# Altium PCB OS-2024-Badge-PCB-REV0.PcbDoc
Units mil, origin at the board's own origin, x right, y up, seen from the top; angles counter-clockwise.
Board outline 2745 x 3430 mil, 2 copper layers (Top Layer, Bottom Layer); 94 components, 73 nets, 270 pads, 77 vias.
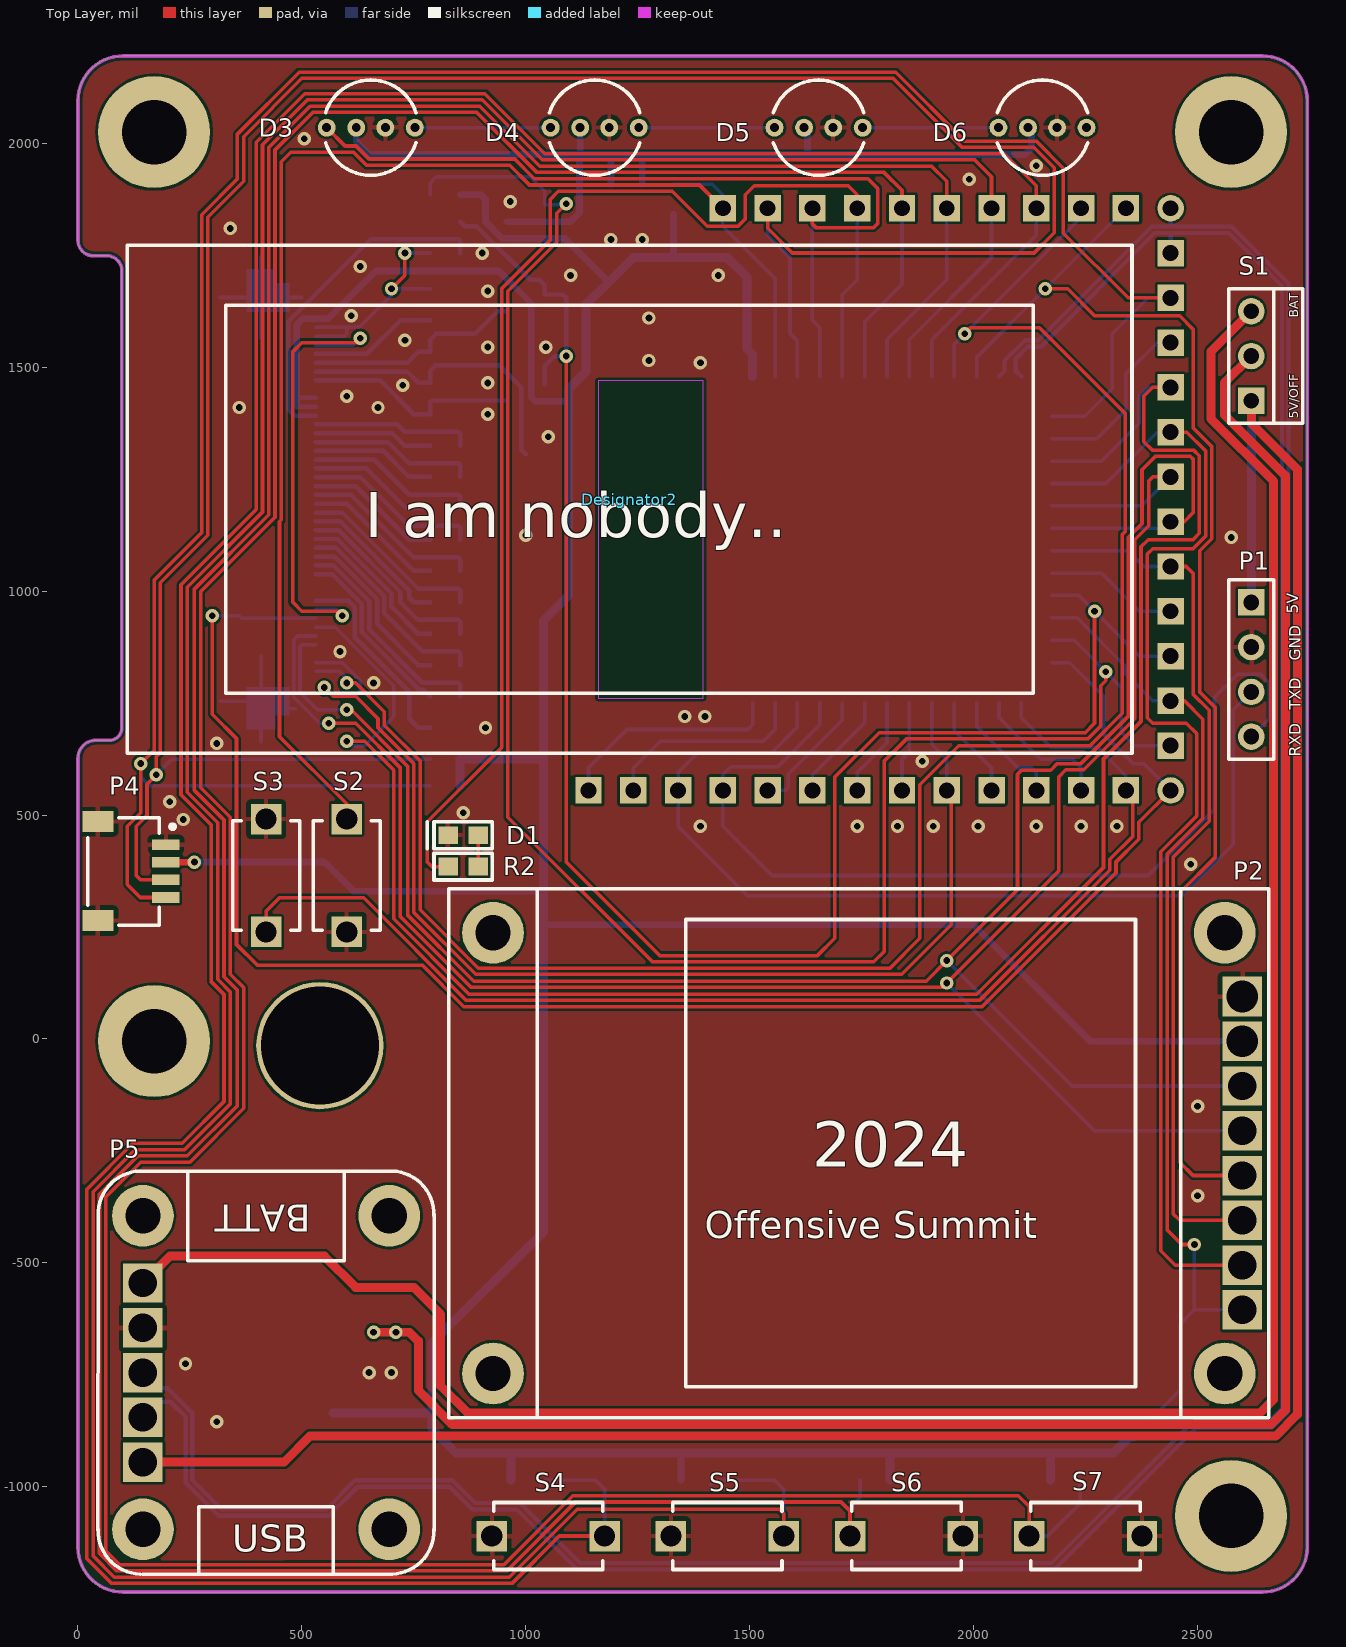
[diagram p0: Top Layer view]
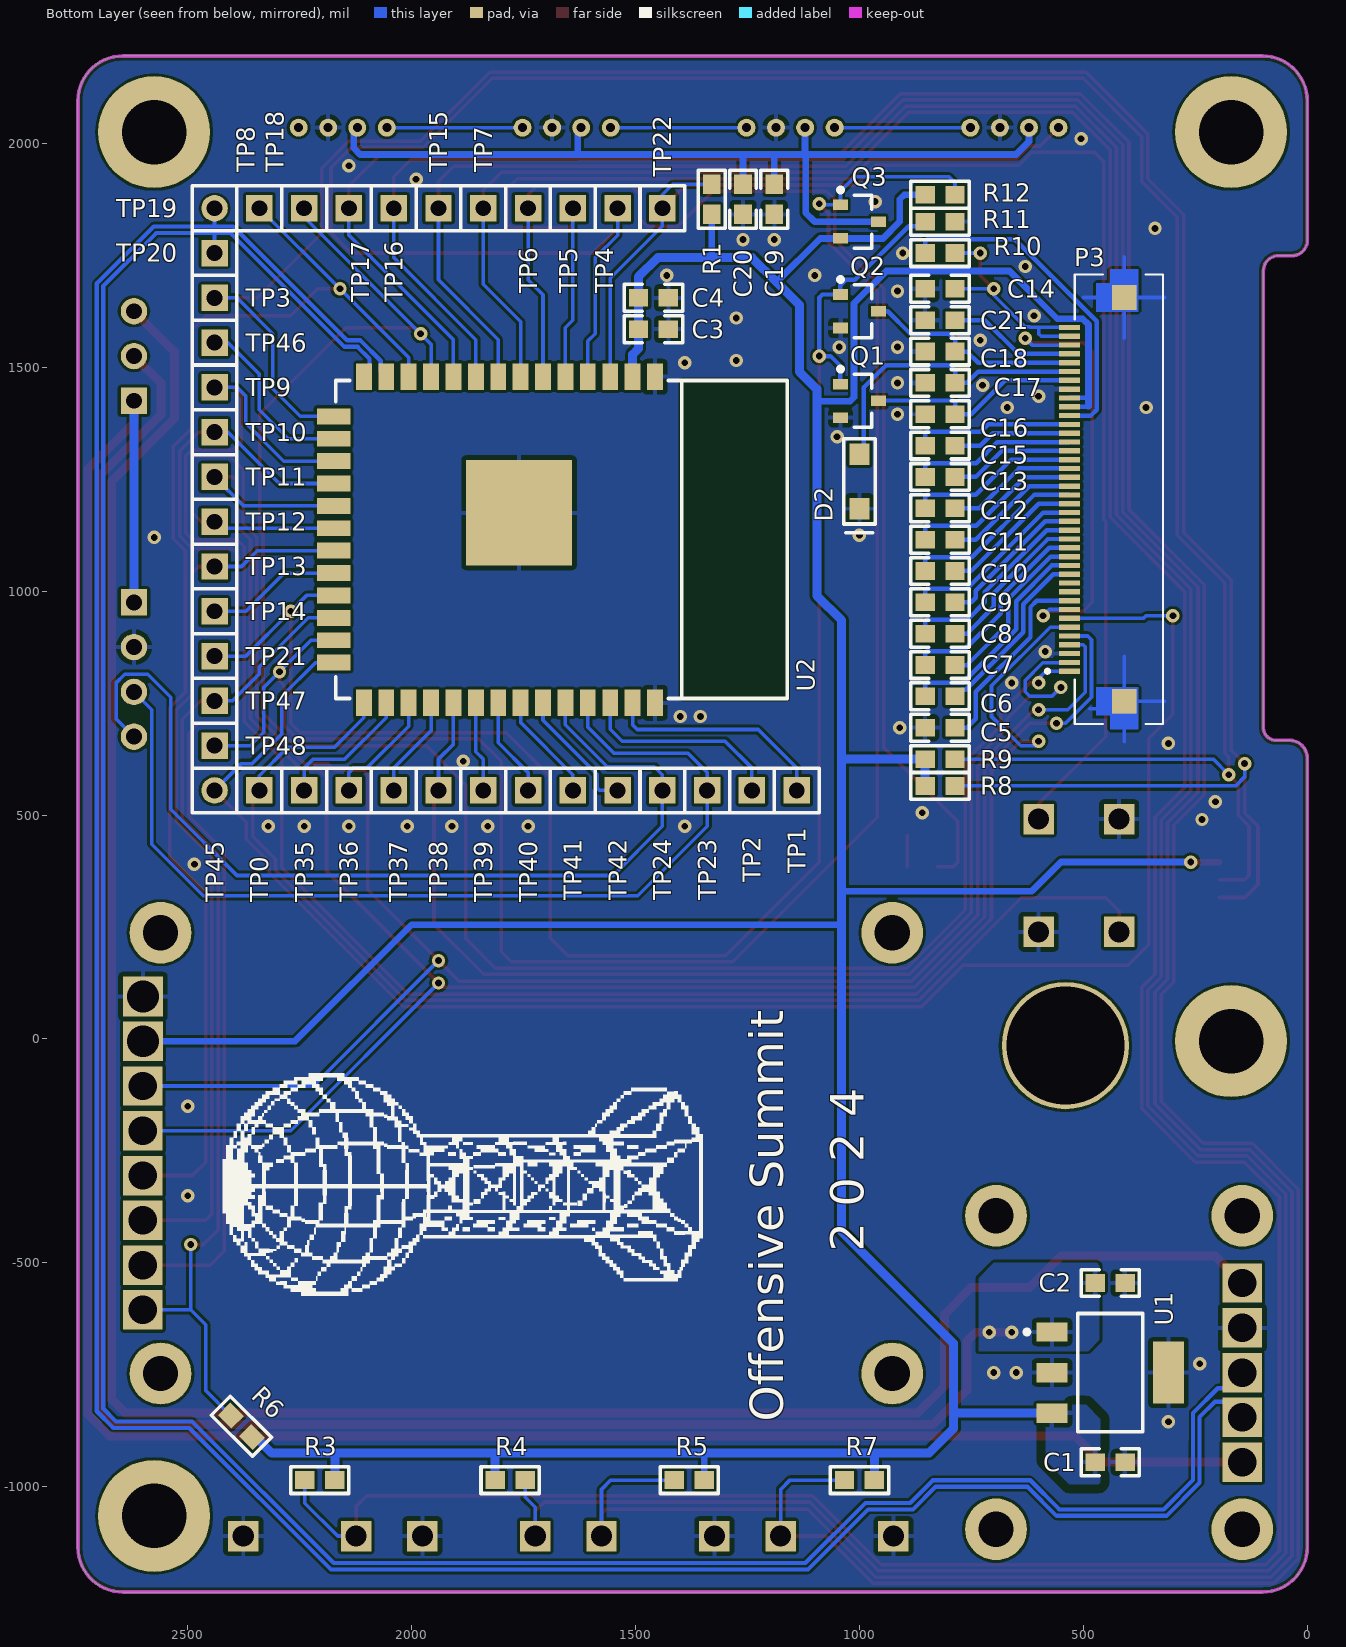
[diagram p1: Bottom Layer view, seen from below]

## Layer stack, top to bottom
Top Solder: solder mask 0.4, Solder Resist, Dk 3.5
Top Layer: signal copper 1.4
Dielectric1: dielectric 12.6, FR-4, Dk 4.8
Bottom Layer: signal copper 1.4
Bottom Solder: solder mask 0.4, Solder Resist, Dk 3.5

## Board outline
0,-1135 0,627 cw(c40,627) 40,667 70,667 ccw(c70,695) 98,695 98,1715 ccw(c64,1715) 64,1749 34,1749 cw(c34,1783) 0,1783 0,2095 cw(c100,2095) 100,2195 2645,2195 cw(c2645,2095) 2745,2095 2745,-1135 cw(c2645,-1135) 2645,-1235 100,-1235 cw(c100,-1135)

## Design rules (kind name [scope] priority, off if disabled: settings)
Clearance Clearance_2 [(InPolygon AND InNet('3.3V')) vs (InPolygon AND InNet('GND'))] p1: gap=20 ignorepadtopadclearanceinfootprint=FALSE
Clearance Clearance_3 [InNet('DP') vs InNet('DM')] p2: gap=5 ignorepadtopadclearanceinfootprint=FALSE except(0: Arc-Hole Track-Hole SMDPad-Hole THPad-Hole Via-Hole Fill-Hole Poly-Hole Region-Hole Text-Hole)
Clearance Clearance_1 [InNetClass('USB') vs InNet('GND')] p3: gap=5 ignorepadtopadclearanceinfootprint=FALSE except(0: Arc-Hole Track-Hole SMDPad-Hole THPad-Hole Via-Hole Fill-Hole Poly-Hole Region-Hole Text-Hole)
Clearance [All] p4: gap=6 ignorepadtopadclearanceinfootprint=FALSE except(0: Arc-Hole Track-Hole SMDPad-Hole THPad-Hole Via-Hole Fill-Hole Poly-Hole Region-Hole Text-Hole)
HoleSize [All] p1: absolutevalues=TRUE maxlimit=270 minlimit=15 maxpercent=80.000 minpercent=20.000
MinimumSolderMaskSliver [All] p1: minsoldermaskwidth=2.5
PolygonConnect PolygonConnect_1 [IsVia vs IsPolygon] p1: connectstyle=Direct reliefconductorwidth=10 reliefentries=4 polygonreliefangle="90 Angle" airgapwidth=10
PolygonConnect [All] p2: connectstyle=Relief reliefconductorwidth=10 reliefentries=4 polygonreliefangle="90 Angle" airgapwidth=10
RoomDefinition OS-2024-Badge-Schematic-REV0 [InComponentClass('OS-2024-Badge-Schematic-REV0')] p1: confinementstyle=ConfineIn formatcopy=TRUE lockcomponents=FALSE outline -8962.2,-7193.9 -6962.2,-7193.9 -6962.2,-6193.9 -8962.2,-6193.9
RoutingVias [All] p1: holewidth=15 width=30 viastyle="Through Hole" minholewidth=15 minwidth=30 maxholewidth=15 maxwidth=30
SilkToSolderMaskClearance SilkscreenOverComponentPads [IsPad] p1: minsilkscreentomaskgap=3 clearancetoexposedcopper=TRUE
SolderMaskExpansion [All] p1: expansion=4
Width Width_1 [InNetClass('USB')] p1: maxlimit=9.5 minlimit=9.5 preferedwidth=9.5
Width [All] p2: maxlimit=25 minlimit=8 preferedwidth=8
27 further rules are at their usual default settings.

## Classes and differential pairs
net class USB: DM DP

## Components (designator, comment, footprint, x,y, rotation, side; value= is the part's Value field where it differs from the comment)
C1 "1u" 0603C 440,-945 r180 bottom
C2 "1u" 0603C 440,-545 r180 bottom
C3 "10u" 0603C 1460,1585 r180 bottom
C4 "100n" 0603C 1460,1655 r180 bottom
C5 "2.2u" 0603C 820,695 r180 bottom
C6 "2.2u" 0603C 820,765 r0 bottom
C7 "2.2u" 0603C 820,835 r0 bottom
C8 "2.2u" 0603C 820,905 r0 bottom
C9 "2.2u" 0603C 820,975 r0 bottom
C10 "2.2u" 0603C 820,1045 r180 bottom
C11 "2.2u" 0603C 820,1115 r180 bottom
C12 "2.2u" 0603C 820,1185 r180 bottom
C13 "2.2u" 0603C 820,1255 r180 bottom
C14 "1u" 0603C 820,1675 r180 bottom
C15 "2.2u" 0603C 820,1325 r180 bottom
C16 "2.2u" 0603C 820,1395 r0 bottom
C17 "2.2u" 0603C 820,1465 r0 bottom
C18 "2.2u" 0603C 820,1535 r0 bottom
C19 "10u" 0603C 1190,1875 r270 bottom
C20 "1u" 0603C 1260,1875 r270 bottom
C21 "2.2u" 0603C 820,1605 r0 bottom
D1 "LED2" 0603LED 860,455 r180 top
D2 "40V" SOD-123FL 1000,1245 r90 bottom
D3 "RGB" COM-12986 653.82,2035 r0 top
D4 "RGB" COM-12986 1153.82,2035 r0 top
D5 "RGB" COM-12986 1653.82,2035 r0 top
D6 "RGB" COM-12986 2153.82,2035 r0 top
Designator2 "Comment" E2200CS021 1231.58,1205 r0 top
P1 "Header 4" HDR1X4 2620,975 r270 top
P2 "Header 8" TFT144SPI 1743.7,-255 r270 top
P3 "CONN FPC TOP 40POS 0.5MM R/A" AMPHENOL_62684-402100ALF 390,1205 r90 bottom locked
P4 "SM04B-SRSS-TB" SM04B-TRSS-TB 120,375 r270 top
P5 "Header 5" MICRO-LIPO-USBC 420,-745 r270 top
Q1 "2N7002" SOT-23-N 1000,1425 r180 bottom
Q2 "2N7002" SOT-23-N 1000,1625 r180 bottom
Q3 "DMP2045U" SOT-23-P 1000,1825 r180 bottom
R1 "1k" 0603R 1330,1875 r270 bottom
R2 "1k" 0603R 860,385 r0 top
R3 "DNP" 0603R 2205,-985 r180 bottom
R4 "DNP" 0603R 1780,-985 r0 bottom
R5 "DNP" 0603R 1380,-985 r180 bottom
R6 "330" 0603R 2380,-865 r225 bottom
R7 "DNP" 0603R 1000,-985 r180 bottom
R8 "10k" 0603R 820,565 r180 bottom
R9 "10k" 0603R 820,625 r180 bottom
R10 "2k" 0603R 820,1755 r0 bottom
R11 "47k" 0603R 820,1825 r180 bottom
R12 "47k" 0603R 820,1885 r180 bottom
S1 "SW-SPDT" HDR1X3 2620,1425 r90 top
S2 "SPST-NO" PTS636SL43LFS 600,365 r270 top
S3 "SPST-NO" PTS636SL43LFS 420,365 r90 top
S4 "SPST-NO" PTS636SL43LFS 1050,-1110 r180 top
S5 "SPST-NO" PTS636SL43LFS 1450,-1110 r180 top
S6 "SPST-NO" PTS636SL43LFS 1850,-1110 r0 top
S7 "SPST-NO" PTS636SL43LFS 2250,-1110 r0 top
TP0 "Test Point" Testpoint#1 2340,555 r0 bottom
TP1 "Test Point" Testpoint#1 1140,555 r0 bottom
TP2 "Test Point" Testpoint#1 1240,555 r90 bottom
TP3 "Test Point" Testpoint#1 2440,1655 r90 bottom
TP4 "Test Point" Testpoint#1 1540,1855 r0 bottom
TP5 "Test Point" Testpoint#1 1640,1855 r0 bottom
TP6 "Test Point" Testpoint#1 1740,1855 r90 bottom
TP7 "Test Point" Testpoint#1 1840,1855 r90 bottom
TP8 "Test Point" Testpoint#1 2340,1855 r90 bottom
TP9 "Test Point" Testpoint#1 2440,1455 r0 bottom
TP10 "Test Point" Testpoint#1 2440,1355 r0 bottom
TP11 "Test Point" Testpoint#1 2440,1255 r180 bottom
TP12 "Test Point" Testpoint#1 2440,1155 r270 bottom
TP13 "Test Point" Testpoint#1 2440,1055 r180 bottom
TP14 "Test Point" Testpoint#1 2440,955 r90 bottom
TP15 "Test Point" Testpoint#1 1940,1855 r90 bottom
TP16 "Test Point" Testpoint#1 2040,1855 r180 bottom
TP17 "Test Point" Testpoint#1 2140,1855 r180 bottom
TP18 "Test Point" Testpoint#1 2240,1855 r180 bottom
TP19 "Test Point" Testpoint#2 2440,1855 r180 bottom
TP20 "Test Point" Testpoint#1 2440,1755 r90 bottom
TP21 "Test Point" Testpoint#1 2440,855 r90 bottom
TP22 "Test Point" Testpoint#1 1440,1855 r0 bottom
TP23 "Test Point" Testpoint#1 1340,555 r0 bottom
TP24 "Test Point" Testpoint#1 1440,555 r90 bottom
TP35 "Test Point" Testpoint#1 2240,555 r180 bottom
TP36 "Test Point" Testpoint#1 2140,555 r90 bottom
TP37 "Test Point" Testpoint#1 2040,555 r270 bottom
TP38 "Test Point" Testpoint#1 1940,555 r90 bottom
TP39 "Test Point" Testpoint#1 1840,555 r270 bottom
TP40 "Test Point" Testpoint#1 1740,555 r180 bottom
TP41 "Test Point" Testpoint#1 1640,555 r90 bottom
TP42 "Test Point" Testpoint#1 1540,555 r90 bottom
TP45 "Test Point" Testpoint#2 2440,555 r90 bottom
TP46 "Test Point" Testpoint#1 2440,1555 r90 bottom
TP47 "Test Point" Testpoint#1 2440,755 r0 bottom
TP48 "Test Point" Testpoint#1 2440,655 r0 bottom
U1 "TC1262-3.3VDBTR" SOT-223-2 440,-745 r270 bottom
U2 "ESP32-S3-WROOM" ESP32-S3-WROOM-1-N16R8 1161.57,1470.28 r270 bottom

## Footprints (in the part's own frame and the unit in brackets; to place one, negate y for a bottom-side part, rotate by r counter-clockwise, add the part's x,y. Pads: shape width x height; smd on the part's side, far side on the other; paste and mask are expansions set on the pad)
0603C [mm] "Chip Capacitor, Body 1.6x0.8mm, IPC High Density"
  rect 1.1x1 smd: 1(-0.85,0) 2(0.85,0)
  silkscreen extent -1.65,-0.76 1.65,0.76, body extent -0.87,-0.48 0.87,0.48, height 1.3
0603LED [mm] "Chip Diode; Body 1.6 x 0.9 mm (LxW typ)"
  rect 1.1x1 smd: 1(-0.85,0) 2(0.85,0)
  silkscreen extent -1.65,-0.76 2.03,0.76, body extent -0.8,-0.45 0.8,0.45, height 0.55
0603R [mm] "Chip Resistor; Body 1.6 x 0.9 mm (LxW typ)"
  rect 1.1x1 smd: 1(-0.85,0) 2(0.85,0)
  silkscreen extent -1.65,-0.76 1.65,0.76, body extent -0.8,-0.45 0.8,0.45, height 0.55
AMPHENOL_62684-402100ALF [mm]
  rect 0.3x1.2 smd: 1(-9.75,3.575) 2(-9.25,3.575) 3(-8.75,3.575) 4(-8.25,3.575) 5(-7.75,3.575) 6(-7.25,3.575) 7(-6.75,3.575) 8(-6.25,3.575) 9(-5.75,3.575) 10(-5.25,3.575) 11(-4.75,3.575) 12(-4.25,3.575) 13(-3.75,3.575) 14(-3.25,3.575) 15(-2.75,3.575) 16(-2.25,3.575) 17(-1.75,3.575) 18(-1.25,3.575) 19(-0.75,3.575) 20(-0.25,3.575) 21(0.25,3.575) 22(0.75,3.575) 23(1.25,3.575) 24(1.75,3.575) 25(2.25,3.575) 26(2.75,3.575) 27(3.25,3.575) 28(3.75,3.575) 29(4.25,3.575) 30(4.75,3.575) 31(5.25,3.575) 32(5.75,3.575) 33(6.25,3.575) 34(6.75,3.575) 35(7.25,3.575) 36(7.75,3.575) 37(8.25,3.575) 38(8.75,3.575) 39(9.25,3.575) 40(9.75,3.575)
  rect 1.4x1.4 smd paste-2 mask+0: S1(-11.45,0.475) S2(11.45,0.475)
  Top Layer region: 12.25,1.275 13.05,1.275 13.05,-0.325 10.65,-0.325 10.65,2.075 12.25,2.075
  Top Layer region: -10.65,-0.325 -13.05,-0.325 -13.05,1.275 -12.25,1.275 -12.25,2.075 -10.65,2.075
  silkscreen extent -12.75,-1.73 12.75,4.92, body extent -12.75,-2.5 12.75,3.1, height 2
COM-12986 [mil] "ADDRESS LED DISCR SERIAL RGB 5PC"
  round 40 hole 20: 1(-98.43,0) 2(-32.48,0) 3(32.48,0) 4(98.43,0)
  silkscreen extent -101,-106 101,106
E2200CS021 [mil] "E2200CS021 DISPLAY 2.0\" B&W AURORA MB EC"
  silkscreen extent -1122,-567 1122,567, body extent -1122,-567 1122,567, height 39
ESP32-S3-WROOM-1-N16R8 [mm] "ESP32-S3-WROOM-1-N16R8"
  rect 1.5x0.9 smd: 1(-0.225,-7.493) 2(-0.225,-8.763) 3(-0.225,-10.033) 4(-0.225,-11.303) 5(-0.225,-12.573) 6(-0.225,-13.843) 7(-0.225,-15.113) 8(-0.225,-16.383) 9(-0.225,-17.653) 10(-0.225,-18.923) 11(-0.225,-20.193) 12(-0.225,-21.463) 13(-0.225,-22.733) 14(-0.225,-24.003) 27(18.284,-24.003) 28(18.284,-22.733) 29(18.284,-21.463) 30(18.284,-20.193) 31(18.284,-18.923) 32(18.284,-17.653) 33(18.284,-16.383) 34(18.284,-15.113) 35(18.284,-13.843) 36(18.284,-12.573) 37(18.284,-11.303) 38(18.284,-10.033) 39(18.284,-8.763) 40(18.284,-7.493)
  rect 0.9x1.9 smd paste-0.686: 15(2.03,-25.718) 16(3.3,-25.718) 17(4.57,-25.718) 18(5.84,-25.718) 19(7.11,-25.718) 20(8.38,-25.718) 21(9.65,-25.718) 22(10.92,-25.718) 23(12.19,-25.718) 24(13.46,-25.718)
  rect 0.9x1.9 smd: 25(14.73,-25.718) 26(16,-25.718)
  rect 6x6 smd paste-3.048: 101(7.5,-15.2)
  Keep-Out Layer region: 0,0 18.034,0 18.034,-5.969 0,-5.969
  silkscreen extent 0,-25.6 18.03,0
HDR1X3 [mm] "Connector; Header; 3 Position"
  rect 1.5x1.5 hole 0.9: 1(0,0)
  round 1.5 hole 0.9: 2(2.54,0) 3(5.08,0)
  silkscreen extent -1.27,-1.27 6.35,1.27
HDR1X4 [mm] "Connector; Header; 4 Position"
  rect 1.5x1.5 hole 0.9: 1(0,0)
  round 1.5 hole 0.9: 2(2.54,0) 3(5.08,0) 4(7.62,0)
  silkscreen extent -1.27,-1.27 8.89,1.27
MICRO-LIPO-USBC [mm] "Adafruit MicroLipo USB Charger"
  rect 2.237x2.237 hole 1.61: 1(5.08,-6.985) 2(2.54,-6.985) 3(0,-6.985) 4(-2.54,-6.985) 5(-5.08,-6.985)
  round 3.5 hole 2: M1(-8.89,6.985) M1(-8.89,-6.985) M1(8.89,6.985) M1(8.89,-6.985)
  silkscreen extent -11.43,-9.54 11.43,9.53
PTS636SL43LFS [mil] "Tactile Switch SPST-NO Top Actuated Through Hole"
  rect 68x68 hole 47.24: 1(-125.98,0) 2(125.98,0)
  silkscreen extent -122,-75 122,75, body extent -133,-69 133,69, height 197
SM04B-TRSS-TB [mm] "CONN HEADER SMD R/A 4POS 1MM"
  rect 1.2x1.749 smd: 0(-2.8,-1.912) 0(2.8,-1.912)
  rect 0.6x1.55 smd: 1(-1.5,1.938) 2(-0.5,1.938) 3(0.5,1.938) 4(1.5,1.938)
  silkscreen extent -3.02,-2.51 3.07,2.44, body extent -3.02,-2.51 3.07,1.56, height 6.25
SOD-123FL [mm] "DIODE SCHOTTKY 40V 2A SOD123FL"
  rect 1.22x1.15 smd: 1(-1.55,0) 2(1.55,0)
  silkscreen extent -2.92,-0.89 2.41,0.89, body extent -1.45,-0.95 1.45,0.95, height 1.1
SOT-23-N [mm] "MOSFET N-CH 60V 280MA SOT23-3"
  rect 0.85x0.6 smd: 1(-1.075,0.95) 2(-1.075,-0.95) 3(1.075,0)
  silkscreen extent -1.2,-1.5 0.7,1.92, body extent -0.7,-1.5 0.7,1.5, height 1.1
SOT-23-P [mm] "MOSFET P-CH 20V 4A SOT23-3"
  rect 0.85x0.6 smd: D(1.075,0) G(-1.075,0.95) S(-1.075,-0.95)
  silkscreen extent -1.2,-1.5 0.7,1.92, body extent -0.7,-1.5 0.7,1.5, height 1.1
SOT-223-2 [mm] "SOT-223/SC-73; 4 Leads; Body 6.7 x 7.3 mm, inc. leads (LxW max)"
  rect 1.1x1.75 smd: 1(-2.3,-3.3) 2(0,-3.3) 3(2.3,-3.3)
  rect 3.5x1.75 smd: 4(0,3.3)
  silkscreen extent -3.35,-4.85 3.35,1.85, body extent -3.35,-3.7 3.35,3.5, height 1.85
Testpoint#1 [mm] "1 Pos Header"
  rect 1.5x1.5 hole 0.9: 1(0,0)
  silkscreen extent -1.27,-1.27 1.27,1.27
Testpoint#2 [mm] "1 Pos Header"
  round 1.5 hole 0.9: 1(0,0)
  silkscreen extent -1.27,-1.27 1.27,1.27
TFT144SPI [mm] "1.44\" 128x128 65K SPI Full Color TFT LCD Display Module ST7735 OLED for Arduino"
  rect 2.257x2.257 hole 1.8: 1(-8.89,21.75) 2(-6.35,21.75)
  rect 2.237x2.237 hole 1.61: 3(-3.81,21.75) 4(-1.27,21.75) 5(1.27,21.75) 6(3.81,21.75) 7(6.35,21.75) 8(8.89,21.75)
  round 3.5 hole 2: M1(-12.5,20.75) M2(12.5,20.75) M3(-12.5,-20.75) M4(12.5,-20.75)
  silkscreen extent -15,-23.25 15,23.25

## Part data
C1 C2 C14 C20: library part Cap, "CAP CER 1UF 50V Z5U 0603", Distributor Part Number=490-12331-1-ND, Manufacturer="Murata Electronics North America", Manufacturer Part Number=GRT188R61H105ME13D, Distributor=Digikey
C3 C19: library part Cap, "CAP CER 10UF 10V X5R 0603", Distributor Part Number=490-14372-1-ND, Manufacturer="Murata Electronics North America", Manufacturer Part Number=GRN188R61A106KE69J, Distributor=Digikey
C4: library part Cap, "CAP CER .1UF 10V X7R 0603", Distributor Part Number=732-7939-1-ND, Manufacturer="Wurth Electronics Inc.", Manufacturer Part Number=885012206020, Distributor=Digikey
C5 C6 C7 C8 C9 C10 C11 C12 C13 C15 C16 C17 C18 C21: library part Cap, "CAP CER 2.2UF 10V X5R 0603", Distributor Part Number=2571-GMC10X5R225M10NTTR-ND, Manufacturer="Cal-Chip Electronics, Inc.", Manufacturer Part Number=GMC10X5R225M10NT, Distributor=Digikey
D1: "LED ORANGE CLEAR CHIP SMD", Distributor Part Number=754-1120-1-ND, Manufacturer=Kingbright, Manufacturer Part Number=AOT1608SECK, Distributor=Digi-Key
D2: library part "Diode BAT17", "DIODE SCHOTTKY 40V 2A SOD123FL", Distributor Part Number=3757-SS2040FL_R1_00001CT-ND, Manufacturer="Panjit International Inc.", Manufacturer Part Number=SS2040FL_R1_00001, Distributor=Digikey
D3 D4 D5 D6: library part LED2_1, "ADDRESS LED DISCR SERIAL RGB", Distributor Part Number=1568-1213-ND, Manufacturer="Spark Fun", Manufacturer Part Number=COM-12986, Distributor=Digi-Key
P1: "Header, 4-Pin", Distributor Part Number=732-5317-ND, Manufacturer="Wurth Elektronik", Manufacturer Part Number=61300411121, Distributor=Digi-Key
P2: library part Display_128_128, "1.44\" 128x128 65K SPI Full Color TFT LCD Display Module ST7735 OLED for Arduino", Distributor Part Number=ED90446-ND, Manufacturer=Mill-Max, Manufacturer Part Number=7406-0-15-15-18-27-10-0, Distributor=DigiKey, MFG-Comment="8 each for P2", Old Header=S7006-ND
P3: library part "Header 40", Distributor Part Number=609-1200-1-ND, Manufacturer="Amphenol ICC (FCI)", Manufacturer Part Number=62684-402100ALF, Distributor=Digi-Key
P4: library part "Header 5", "CONN HEADER SMD R/A 4POS 1MM", Distributor Part Number=455-SM04B-SRSS-TBCT-ND, Manufacturer="JST Sales America Inc.", Distributor=Digikey, Manufacturer Part Number=SM04B-SRSS-TB
P5: "Adafruit Micro-Lipo Charger for LiPoly Batt with USB Type C Jack", Distributor Part Number=ED90446-ND, Manufacturer=Mill-Max, Manufacturer Part Number=7406-0-15-15-18-27-10-0, Distributor=Digikey, MFG-Comment="5 each for P5"
Q1 Q2: library part NMOS-2, "MOSFET N-CH 60V 280MA SOT23-3", Distributor Part Number=4878-2N7002CT-ND, Manufacturer="Diotec Semiconductor", Distributor=Digikey, Manufacturer Part Number=2N7002
Q3: library part PMOS-2, "P-Channel Power MOSFET", Distributor Part Number=DMP2045U-7DICT-ND, Manufacturer="Diodes Incorporated", Manufacturer Part Number=DMP2045U-7, Distributor=Digikey
R1 R2: library part Res2, "RES SMD 1K OHM 5% 1/10W 0603", Distributor Part Number=311-1.0KGRCT-ND, Manufacturer=Yageo, Manufacturer Part Number=RC0603JR-071KL, Distributor=Digikey
R3 R4 R5 R7: library part Res2, "RES SMD 1K OHM 5% 1/10W 0603", Distributor Part Number=NONE, Distributor=NONE, Manufacturer=NONE, Manufacturer Part Number=NONE, MFG-Comment="DO NOT POPULATE"
R6: library part Res2, "RES SMD 330 OHM 5% 1/10W 0603", Distributor Part Number=311-330GRCT-ND, Manufacturer=Yageo, Manufacturer Part Number=RC0603JR-07330RL, Distributor=Digikey
R8 R9: library part Res2, "RES SMD 47K OHM 5% 1/10W 0603", Distributor Part Number=311-10KGRCT-ND, Manufacturer=Yageo, Manufacturer Part Number=RC0603JR-0710KL, Distributor=Digikey
R10: library part Res2, "RES SMD 1K OHM 5% 1/10W 0603", Distributor Part Number=311-2.0KGRCT-ND, Manufacturer=Yageo, Manufacturer Part Number=RC0603JR-072KL, Distributor=Digikey
R11 R12: library part Res2, "RES SMD 47K OHM 5% 1/10W 0603", Distributor Part Number=311-47KGRCT-ND, Manufacturer=Yageo, Manufacturer Part Number=RC0603JR-0747KL, Distributor=Digikey
S1: "SPDT Subminiature Toggle Switch, Right Angle Mounting, Vertical Actuation", Distributor Part Number=EG1903-ND, Manufacturer=E-Switch, Distributor=Digikey, Manufacturer Part Number=EG1903-ND
S2 S3 S4 S5 S6 S7: library part "SPST-NO 2 PIN", "Tactile Switch SPST-NO Top Actuated Through Hole", Distributor Part Number=CKN12301-ND, Manufacturer=C&K, Manufacturer Part Number="PTS636 SL43 LFS", Distributor=Digikey
TP0 TP1 TP2 TP3 TP4 TP5 TP6 TP7 TP8 TP9 TP10 TP11 TP12 TP13 TP14 TP15 TP16 TP17 TP18 TP19 TP20 TP21 TP22 TP23 TP24 TP35 TP36 TP37 TP38 TP39 TP40 TP41 TP42 TP45 TP46 TP47 TP48: library part TestPoint, "Test Point Do Not Populate", Distributor Part Number=NONE, Distributor=NONE, Manufacturer=NONE, Manufacturer Part Number=NONE, MFG-Comment="DO NOT POPULATE!"
U1: library part "Header 3", "IC REG LINEAR 3.3V 500mA SOT223-3", Distributor Part Number=TC1262-3.3VDBCT-ND, Manufacturer="Microchip Technology", Distributor=Digikey, Manufacturer Part Number=TC1262-3.3VDBTR
U2: "Bluetooth, WiFi 802.11b/g/n, Bluetooth v5.0 Transceiver Module 2.4GHz PCB Trace Surface Mount", Distributor Part Number=1965-ESP32-S3-WROOM-1-N16R8TR-ND, Manufacturer="Espressif Systems", Manufacturer Part Number=ESP32-S3-WROOM-1-N16R8, Distributor=Digikey, MFG-Comment="No Solder paste on large GND pad, No solder paste on extra pads!!  See OS-2020-Badge-REV0-Assembly-Revised.pdf"

## Free pads (board coordinates)
  round 250 hole 144: 0(170,-5) 0(170,2025) 0(2575,-1065) 0(2575,2025)
  round 284 hole 263.78: 0(540,-15)

## Via types
v1: diameter 30, hole 15, Top Layer to Bottom Layer, 77 vias

## Nets (pads, with @x,y where several pads share a name; then routed paths per layer and width w, separated by ;. In a path a pad name is that pad's centre, name@x,y a point inside that pad or via, vN(x,y) a via of type N, cw(c..) or ccw(c..) an arc to the next point about the centre after c; other vN are vias at no path point)
3.3V: C1.1 C3.1 C4.1 P2.2 P3.31 P3.32 P4.2 Q3.S R1.2 R3.2 R4.2 R5.2 R6.2 R7.2 R8.1 R9.1 R12.1 U1.3 U2.2 | length 9861.4
  Top Layer w15: P4.2 259.68,394.69 v1(260,395)
  Bottom Layer w10: 488.5,1412.88 489.68,1411.69 P3.31 ; 488.5,1435 492.12,1431.38 P3.32
  Bottom Layer w15: v1(260,395) 550,395 615,330 1040,330 ; 488.5,1412.88 488.5,1435 488.5,1595.23 501.53,1608.26 558.26,1608.26 665,1715 940,1715 1012.09,1642.91 1012.09,1432.91 1021,1424 1095,1424 ; R12.1 900,1885 910,1875 910,1825 947.4,1787.6 Q3.S 1087.4,1787.6 1185,1690 ; 1040,255 2000,255 2260,-5 P2.2 ; 1330,1745 R1.2 ; 1340,-925 1346.54,-931.54 R5.2
  Bottom Layer w20: U1.3 790,-835.55 ; R8.1 R9.1 1040,625 ; R7.2 966.54,-925 ; U2.2 1506.58,1528.42 1493.46,1541.54 C3.1 C4.1 1493.46,1701.54 1450,1745 1330,1745 1240,1745 1185,1690 1134,1639 1134,1490 1095,1451 1095,990 1040,935 1040,625 ; R4.2 1813.46,-928.46 1810,-925 ; R3.2 2171.54,-926.54 2170,-925 ; R6.2 2348.25,-888.66 2311.92,-925 2170,-925 ; 790,-835.55 790,-680 1040,-430 1040,255 1040,330 1040,625 ; 790,-835.55 790,-870 845,-925 966.54,-925 ; 966.54,-925 1340,-925 1810,-925 ; 1810,-925 2170,-925
5V: P1.1 P5.1 S1.1 | length 5378.3
  Top Layer w20: P5.1 460,-945 518,-887 2674.57,-887 2723,-838.57 2723,1272 2620,1375 S1.1
  Bottom Layer w20: P1.1 S1.1
BL: P2.8 R6.1 TP47.1 U2.24 | length 2236.2
  Top Layer w8: TP47.1 2471,755 2512,714 2512,492.2 2432,412.2 2432,-426 2465,-459 v1(2493,-459)
  Bottom Layer w8: U2.24 2230.64,940.36 2340,831 2340,815 2400,755 TP47.1 TP47.1@2461,755 ; R6.1 2460,-785 2460,-638 2493,-605 ; v1(2493,-459) 2493,-605 ; P2.8 2493,-605
BORDER: P3.8 P3.38 | length 1015.6
  Top Layer w8: v1(590,945) 580,955 500,955 480,975 480,1535 500,1555 620,1555 v1(630,1565)
  Bottom Layer w8: P3.8 576.06,958.94 v1(590,945) ; P3.38 614.49,1549.49 v1(630,1565)
BTN1: R3.1 S7.1 TP7.1 U2.7 | length 7800.9
  Top Layer w8: TP7.1 1840,1895 1800,1935 1024.8,1935 890.8,2069 524,2069 440,1985 440,1165 274,999 274,560.8 340,494.8 340,144.8 370,114.8 370,-155 250,-275 140,-275 62,-353 62,-1143 92.9,-1173.9 461.1,-1173.9 951.1,-1173.9 1105,-1020 2100,-1020 2124.02,-1044.02 S7.1
  Bottom Layer w8: U2.7 1756.58,1601.58 1840,1685 TP7.1 ; S7.1@2124.02,-1100 2134.02,-1110 2165,-1110 2238.46,-1036.54 R3.1
BTN2: R4.1 S6.1 TP15.1 U2.8 | length 7507.7
  Top Layer w8: S6.1 1724.02,-1054.02 1704,-1034 1111,-1034 957.1,-1187.9 87.1,-1187.9 48,-1148.8 48,-347 134,-261 244.2,-261 356,-149.2 356,109 326,139 326,489 260,555 260,1004.8 426,1170.8 426,1990.8 518.2,2083 896.8,2083 1030.8,1949 1906,1949 1940,1915 TP15.1
  Bottom Layer w8: S6.1 1724.02,-1045.98 1746.54,-1023.46 R4.1 ; U2.8 1806.58,1561.58 1940,1695 TP15.1
BTN3: R5.1 S5.1 TP16.1 U2.9 | length 7672.5
  Top Layer w8: S5.1 1575.98,-1060 1565.98,-1050 1115.2,-1050 963.3,-1201.9 81.3,-1201.9 34,-1154.6 34,-341.2 128.2,-247 238.4,-247 340,-145.4 340,105 312,133 312,483 244,551 244,1008.6 412,1176.6 412,1996.6 512.4,2097 902.6,2097 1036.6,1963 2002,1963 2040,1925 TP16.1
  Bottom Layer w8: R5.1@1413.46,-995 1423.46,-985 1555,-985 1575.98,-1005.98 S5.1 ; U2.9 1856.58,1561.58 2040,1745 TP16.1
BTN4: R7.1 S4.1 TP17.1 U2.10 | length 7340.5
  Top Layer w8: S4.1 1075,-1110 969.1,-1215.9 75.5,-1215.9 20,-1160.4 20,-335.4 122.4,-233 232.6,-233 326,-139.6 326,99.2 298,127.2 298,477.2 230,545.2 230,1014.4 398,1182.4 398,2002.4 506.6,2111 908.4,2111 1042.4,1977 2068,1977 2140,1905 TP17.1
  Bottom Layer w8: R7.1@1033.46,-995 1043.46,-985 1155,-985 1175.98,-1005.98 S4.1 ; U2.10 1906.58,1561.58 2140,1795 TP17.1
BUSY-D2: P3.2 TP38.1 U2.31 | length 2665
  Top Layer w8: v1(550,785) 570,765 620,765 670,715 670,695 750,615 750,282.52 888.29,144.23 1839.23,144.23 1950,255 1950,545 TP38.1
  Bottom Layer w8: P3.2 531.57,840 590.36,840 630,800.36 630,775 620,765 570,765 v1(550,785) ; U2.31 1906.58,658.42 1940,625 TP38.1
CLK-SCL: P2.3 P3.4 TP12.1 U2.20 | length 4764.2
  Top Layer w8: v1(600,735) 610,735 736,609 736,276.72 883.72,129 1894,129 v1(1940,175) 2098,333 2098,591 2107,600 2172,600 2187,615 2239.6,615 2345.8,721.2 2345.8,1120.6 2376,1150.8 2376,1271 2406,1301 2484,1301 2490,1295 2490,1175 2470,1155 TP12.1
  Bottom Layer w8: P3.4 500.2,880.2 495.69,875.69 495.69,774.31 535,735 v1(600,735) ; v1(1940,175) 2220,-105 P2.3 ; U2.20 2425.36,1140.36 TP12.1
CS-D1: P2.7 TP10.1 U2.18 | length 2619.4
  Top Layer w8: TP10.1 2476,1355 2518,1313 2518,1123 2490,1095 2400,1095 2387.8,1082.8 2387.8,717.2 2400,705 2475,705 2498,682 2498,498 2418,418 2418,-473 2450,-505 P2.7
  Bottom Layer w8: U2.18 2295.36,1240.36 2410,1355 TP10.1
CS-D2: P3.1 TP18.1 U2.11 | length 4339.7
  Top Layer w8: v1(600,795) 620,795 684,731 684,700.8 764,620.8 764,288.32 894.09,158.23 1813.23,158.23 1879.53,224.53 1879.53,567.72 1966.8,655 2259.8,655 2331.8,727 2331.8,1126.4 2339,1133.6 2339,1396 2147,1588 1993,1588 v1(1980,1575)
  Bottom Layer w8: P3.1 583.86,821.14 600,805 v1(600,795) ; U2.11 1956.58,1551.58 v1(1980,1575) 2240,1835 TP18.1
DC-D1: P2.6 TP13.1 U2.21 | length 1975.6
  Top Layer w8: TP13.1 2475,1055 2490,1040 2490,770 2526,734 2526,486.4 2446,406.4 2446,-391 2460,-405 P2.6
  Bottom Layer w8: U2.21 2344.64,1090.36 2380,1055 TP13.1
DISCHARGE: Q1.1 Q2.1 R11.1 TP21.1 U2.23 | length 3940.4
  Top Layer w8: v1(1090,1525) 1090,395 1298.77,186.23 1651.23,186.23 1690,225 1690,585 1789,684 2249.2,684 2270,704.8 v1(2270,955)
  Bottom Layer w8: U2.23 2234.64,990.36 v1(2270,955) 2370,855 TP21.1
  Bottom Layer w10: R11.1 863.46,1815 890,1815 1010,1695 1030,1695 1042.32,1682.68 Q2.1 1082.6,1662.4 1090,1655 v1(1090,1525) 1064.65,1525 1042.32,1502.68 Q1.1
DM: P5.2 TP19.1 U2.13 | length 6404.2
  Bottom Layer w9.5: P5.2@160,-830 180,-810 205.94,-810 240.5,-844.56 240.5,-991.01 314.49,-1065 559.56,-1065 624.56,-1000 830,-1000 880.5,-1050.5 980.5,-1050.5 1115,-1185 2180,-1185 2496.5,-868.5 2666.01,-868.5 2703.25,-831.26 2703.25,1687.26 2576.01,1814.5 2441,1814.5 ; U2.13 2069,1491.56 2069,1514.51 2114.49,1560 2143.78,1560 2398.28,1814.5 2441,1814.5 ; TP19.1 2440,1815.5 2441,1814.5
DP: P5.3 TP20.1 U2.14 | length 6367
  Bottom Layer w9.5: P5.3@140,-745 P5.3 180,-780 200,-780 255,-835 255,-985 320.5,-1050.5 553.56,-1050.5 618.56,-985.5 836.01,-985.5 886.51,-1036 986.51,-1036 1121.01,-1170.5 2173.99,-1170.5 2490.49,-854 2660,-854 2688.75,-825.25 2688.75,1681.25 2570,1800 2439,1800 ; U2.14 2094,1491.72 2094,1519 2120.5,1545.5 2149.78,1545.5 2404.28,1800 2439,1800 ; TP20.1 2440,1799 2439,1800
EN: R1.1 S2.1 TP22.1 U2.3 | length 3152.1
  Top Layer w8: S2.1 600,525 450,675 450,1155.2 454,1159.2 454,1959 475,1980 615.2,1980 644.2,1951 964.2,1951 1008.2,1907 1388,1907 TP22.1
  Bottom Layer w8: R1.1 1416.54,1908.46 1440,1885 TP22.1 1440,1815 1556.58,1698.42 U2.3
GND: C1.2 C2.2 C3.2 C4.2 C5.1 C14.1 C16.2 C17.2 C18.2 C19.2 C20.2 C21.2 D1.2 D2.1 D3.3 D4.3 D5.3 D6.3 P1.2 P2.1 P3.3 P3.33 P3.S1 P3.S2 P4.0 P4.1 P5.4 Q1.2 Q2.2 R11.2 S2.2 S3.2 S4.2 S5.2 S6.2 S7.2 U1.2 U1.4 U2.1 U2.40 U2.101 | length 727.3
  Bottom Layer w8: 317.79,754.21 P3.S1 P3.S1@408.7,737 ; 317.79,1655.79 P3.S2 ; P3.S1@394.79,737 P3.S1@408.7,737 ; 408.7,663.3 P3.S1@408.7,737 ; 408.7,1564.87 P3.S2 ; 408.7,1746.7 P3.S2 ; P3.S1@409,764 409,854.91 ; 485.7,737 P3.S1@408.7,737 ; 499.61,1655.79 P3.S2
  other v1: 310,-855 650,-745 700,-745 240,-725 2500,-350 2500,-150 2485,390 1390,475 1740,475 1830,475 1910,475 2010,475 2140,475 2240,475 2320,475 235,490 860,505 205,530 1885,620 310,660 910,695 1355,720 1400,720 660,795 585,865 2575,1120 1000,1125 1050,1345 915,1395 360,1410 670,1410 600,1435 725,1460 915,1465 1390,1510 1275,1515 915,1545 1045,1545 730,1560 1275,1610 610,1615 915,1670 1100,1705 1430,1705 630,1725 903,1755 1190,1785 1260,1785 340,1810 965,1870 1990,1920 2140,1950 505,2010
I2C-SCL: P4.4 R8.2 TP3.1 U2.15 | length 5443.6
  Top Layer w8: P4.4 139.06,315.94 110,345 110,475 140,505 v1(140,615) 170,645 170,1024.8 276,1130.8 276,1840.8 356,1920.8 356,2021 494,2159 1825.8,2159 1979.8,2005 2140.15,2005 2200.47,1944.68 2200.47,1799.53 2345,1655 TP3.1
  Bottom Layer w8: v1(140,615) 140,585 160,565 R8.2 ; U2.15 2248.36,1390.36 2309.8,1451.8 2309.8,1574.8 2390,1655 TP3.1
I2C-SDA: P4.3 R9.2 TP4.1 U2.4 | length 5667.5
  Top Layer w8: P4.3 139.69,355.31 130,365 130,475.2 154,499.2 154,569 v1(175,590) 175,630.2 184,639.2 184,1019 290,1125 290,1835 370,1915 370,2015 500,2145 1820,2145 1974,1991 2134.36,1991 2180,1945.36 2180,1800 2135,1755 1595,1755 1540,1810 TP4.1
  Bottom Layer w8: v1(175,590) 210,625 R9.2 ; TP4.1 1540,1795 1590,1745 1590,1575 1606.58,1558.42 U2.4
LED1: R2.1 TP6.1 U2.6 | length 2866.5
  Top Layer w8: R2.1 790,385 780,395 780,485 946,651 946,1675.8 1055,1784.8 1055,1875.36 1072.64,1893 1327,1893 1405,1815 1474,1815 1490,1831 1490,1885 1510,1905 1720,1905 1740,1885 TP6.1
  Bottom Layer w8: U2.6 1706.58,1661.58 1740,1695 TP6.1
MISO-D2: P3.6 TP9.1 U2.17 | length 4417.2
  Top Layer w8: v1(600,665) 640.4,665 705,600.4 705,268.12 873.12,100 2007.2,100 2290,382.8 2290,625.2 2373.8,709 2373.8,1098.8 2390,1115 2490,1115 2504,1129 2504,1302 2491,1315 2398.9,1315 2380,1333.9 2380,1435 2400,1455 TP9.1
  Bottom Layer w8: P3.6 574.22,919.57 705,788.79 705,720 640,655 600,655 v1(600,665) ; U2.17 2285.36,1290.36 2370,1375 2370,1435 2390,1455 TP9.1
MODE: S3.1 TP0.1 U2.27 | length 2716.2
  Top Layer w8: S3.1 420,285 450,315 638.33,315 867.33,86 2013,86 2304,377 2304,401 2355,452 2355,540 TP0.1
  Bottom Layer w8: U2.27 2106.58,717.42 2173,651 2277,651 2340,588 TP0.1
MOSI-SDA: P2.4 P3.5 TP11.1 U2.19 | length 4589.8
  Top Layer w8: v1(560,705) 620.2,705 720,605.2 720,272.92 877.92,115 1930,115 v1(1940,125) 2190,375 2190,585 2206,601 2246,601 2359.8,714.8 2359.8,1114.8 2391,1146 2391,1246 2400,1255 TP11.1
  Bottom Layer w8: P3.5 489.88,899.88 481.69,891.69 481.69,763.31 540,705 v1(560,705) v1@560,715 ; v1(1940,125) 2270,-205 P2.4 ; U2.19 2375.36,1190.36 TP11.1
NetC5_2: C5.2 P3.9 | length 447.9
  Bottom Layer w10: P3.9 603.75,978.62 618,964.37 618,897 740,775 740,715 760,695 C5.2
NetC6_1: C6.1 P3.12 | length 405.6
  Bottom Layer w10: P3.12 567.32,1037.68 634,971 634,908.01 762.33,779.69 771.85,779.69 C6.1
NetC6_2: C6.2 P3.13 | length 496.3
  Bottom Layer w10: P3.13 570.27,1057.36 650,977.63 650,914.64 768.96,795.69 849.32,795.69 853.46,791.54 C6.2
NetC7_1: C7.1 P3.14 | length 388.4
  Bottom Layer w10: P3.14 573.21,1077.05 668,982.25 668,927 760,835 C7.1
NetC7_2: C7.2 P3.15 | length 469.1
  Bottom Layer w10: P3.15 576.15,1096.73 684,988.88 684,950.64 768.96,865.69 849.32,865.69 853.46,861.54 C7.2
NetC8_1: C8.1 P3.16 | length 361.2
  Bottom Layer w10: P3.16 579.09,1116.42 700,995.51 700,965 760,905 C8.1
NetC8_2: C8.2 P3.17 | length 447.5
  Bottom Layer w10: P3.17 582.03,1136.1 720,998.14 720,975 759.32,935.69 849.32,935.69 853.46,931.54 C8.2
NetC9_1: C9.1 P3.18 | length 339.9
  Bottom Layer w10: P3.18 584.98,1155.79 740,1000.76 740,985 750,975 C9.1
NetC9_2: C9.2 P3.19 | length 421.3
  Bottom Layer w10: P3.19 589.53,1175.47 759.32,1005.69 849.32,1005.69 853.46,1001.54 C9.2
NetC10_1: C10.1 P3.21 | length 408.6
  Bottom Layer w10: P3.21 610.16,1214.84 749.31,1075.69 849.31,1075.69 853.46,1071.54 C10.1
NetC10_2: C10.2 P3.20 | length 318
  Bottom Layer w10: P3.20 599.84,1195.16 750,1045 C10.2
NetC11_1: C11.1 P3.23 | length 395.9
  Bottom Layer w10: P3.23 630.79,1254.21 739.31,1145.69 849.31,1145.69 853.46,1141.54 C11.1
NetC11_2: C11.2 P3.22 | length 305.3
  Bottom Layer w10: P3.22 620.47,1234.53 740,1115 C11.2
NetC12_1: C12.1 P3.25 | length 383.4
  Bottom Layer w10: P3.25 661.42,1293.58 740,1215 759.64,1215 760.33,1215.69 848.63,1215.69 853.46,1210.85 C12.1
NetC12_2: C12.2 P3.24 | length 292.6
  Bottom Layer w10: P3.24 643.73,1273.9 732.63,1185 C12.2
NetC13_1: C13.1 P3.27 | length 370.5
  Bottom Layer w10: P3.27 692.05,1332.95 739.31,1285.69 849.31,1285.69 853.46,1281.54 C13.1
NetC13_2: C13.2 P3.26 | length 279.9
  Bottom Layer w10: P3.26 681.73,1313.27 740,1255 C13.2
NetC15_1: C15.1 P3.29 | length 357.9
  Bottom Layer w10: P3.29 712.68,1372.32 729.31,1355.69 849.31,1355.69 853.46,1351.54 C15.1
NetC15_2: C15.2 P3.28 | length 267.2
  Bottom Layer w10: P3.28 702.36,1352.64 730,1325 C15.2
NetC16_1: C16.1 P3.34 Q1.3 | length 486.6
  Bottom Layer w10: P3.34 674.25,1470.75 750,1395 C16.1 786.54,1421.54 790.68,1425.69 Q1.3@957.68,1425.69
NetC17_1: C17.1 D2.2 P3.35 | length 675.2
  Bottom Layer w10: P3.35 734.57,1490.43 760,1465 C17.1 786.54,1491.54 799.31,1504.31 940.69,1504.31 990,1455 990,1316.02 D2.2
NetC18_1: C18.1 P3.36 Q2.3 | length 490.1
  Bottom Layer w10: P3.36 735,1510.12 759.88,1535 C18.1 786.54,1561.54 799.31,1574.31 886.01,1574.31 936.7,1625 Q2.3
NetC19_1: C19.1 C20.1 D3.2 D4.2 D5.2 D6.2 Q3.D | length 2163.3
  Bottom Layer w15: D3.2@629.21,2035 621.34,2027.13 621.34,2003.66 650,1975 1120,1975 ; Q3.D 1100,1825 1120,1845 1120,1975 ; D4.2@1129.21,2035 1121.34,2027.13 1121.34,1975 ; C19.1 1190,1975 ; C20.1 1260,1975 ; D5.2@1629.21,2035 1629.21,1975.79 1630,1975 ; D6.2@2129.21,2035 2129.21,1989.21 2115,1975 1630,1975 ; 1120,1975 1121.34,1975 ; 1121.34,1975 1190,1975 ; 1190,1975 1260,1975 ; 1260,1975 1630,1975
NetC21_1: C21.1 P3.37 | length 286.9
  Bottom Layer w10: P3.37 644.8,1529.8 720,1605 C21.1
NetD1_1: D1.1 R2.2 | length 70
  Top Layer w8: R2.2 D1.1
NetD3_4: D3.4 D4.1 | length 303.1
  Bottom Layer w8: D3.4 D4.1
NetD4_4: D4.4 D5.1 | length 303.1
  Bottom Layer w8: D4.4 D5.1
NetD5_4: D5.4 D6.1 | length 303.1
  Bottom Layer w8: D5.4 D6.1
NetP3_30: P3.30 R10.2 | length 751.8
  Bottom Layer w10: P3.30 482.99,1392.01 470,1405 470,1602.89 653.21,1786.1 848.9,1786.1 853.46,1781.54 R10.2
NetTP1_1: TP1.1 U2.39 | length 505.4
  Bottom Layer w8: TP1.1 1140,605 1226,691 1496,691 1506.58,701.58 U2.39
NetTP2_1: TP2.1 U2.38 | length 461.3
  Bottom Layer w8: TP2.1 1240,605 1300,665 1530,665 1556.58,691.58 U2.38
NetTP14_1: TP14.1 U2.22 | length 301.3
  Bottom Layer w8: U2.22 2284.64,1040.36 2370,955 TP14.1
NetTP35_1: TP35.1 U2.28 | length 313
  Bottom Layer w8: U2.28 2056.58,717.42 2149,625 2220,625 2240,605 TP35.1
NetTP36_1: TP36.1 U2.29 | length 268.3
  Bottom Layer w8: U2.29 2006.58,698.42 2100,605 2130,605 2140,595 TP36.1
NetTP37_1: TP37.1 U2.30 | length 230
  Bottom Layer w8: U2.30 1956.58,688.42 2040,605 TP37.1
NetTP39_1: TP39.1 U2.32 | length 202.3
  Bottom Layer w8: TP39.1 1840,625 1856.58,641.58 U2.32
NetTP40_1: TP40.1 U2.33 | length 223
  Bottom Layer w8: TP40.1 1740,595 1806.58,661.58 U2.33
NetTP41_1: TP41.1 U2.34 | length 243.7
  Bottom Layer w8: TP41.1 1640,590 1756.58,706.58 U2.34
NetTP42_1: TP42.1 U2.35 | length 287.9
  Bottom Layer w8: TP42.1 1580,555 1586,561 1586,591 1706.58,711.58 U2.35
NetTP46_1: TP46.1 U2.16 | length 401.7
  Bottom Layer w8: U2.16 2275.36,1340.36 2340,1405 2340,1485 2410,1555 TP46.1
NP-DATA: D3.1 TP5.1 U2.5 | length 1935.8
  Top Layer w8: D3.1 596.39,1994 621,1994 650,1965 975,1965 1019,1921 1764,1921 1786,1899 1786,1821 1776.93,1811.93 1648.07,1811.93 1640,1820 TP5.1
  Bottom Layer w8: TP5.1 1640,1605 1656.58,1588.42 U2.5
NP-PWR: Q3.G R12.2 TP48.1 U2.25 | length 4276.5
  Top Layer w8: v1(1090,1865) 1069,1844 1069,1779 960,1670 960,495 1282.77,172.23 1777.23,172.23 1800,195 1800,620 1850,670 2255,670 2284,699 2284,789 2295,800 v1(2295,820)
  Bottom Layer w8: R12.2 786.54,1911.54 800,1925 1010,1925 1042.32,1892.68 Q3.G 1087.4,1862.4 v1(1090,1865) ; U2.25 2224.64,890.36 v1(2295,820) 2330,785 2330,685 2360,655 TP48.1
RESET-D1: P2.5 TP8.1 U2.12 | length 2969.9
  Top Layer w8: v1(2160,1675) 2210,1675 2270,1615 2460,1615 2490,1585 2490,1365 2532,1323 2532,1117.2 2505,1090.2 2505,774.8 2540,739.8 2540,406.46 2460,326.46 2460,-275 2490,-305 P2.5
  Bottom Layer w8: U2.12 2006.58,1521.58 v1(2160,1675) TP8.1
RESET-D2: P3.7 TP45.1 U2.26 | length 3802.6
  Top Layer w8: v1(300,945) 300,725 354,671 354,211 400,165 768.53,165 861.53,72 2018.8,72 2318,371.2 2318,395.2 2369,446.2 2369,484 TP45.1
  Bottom Layer w8: v1(300,945) 360,945 365.75,939.25 P3.7 ; U2.26 2214.64,840.36 2290,765 2290,681 2356,615 2380,615 TP45.1
RXD-IN: P1.4 TP24.1 U2.36 | length 2169.5
  Bottom Layer w8: U2.36 1656.58,701.58 1563,608 1458,608 1440,590 TP24.1 1440,475 1550,365 2390,365 2537.8,512.8 2537.8,762.8 2589.53,814.53 2640.47,814.53 2660,795 2660,715 P1.4
TXD-OUT: P1.3 TP23.1 U2.37 | length 2190.9
  Bottom Layer w8: U2.37 1606.58,696.58 1548,638 1383,638 1340,595 TP23.1 1340,475 1495,320 2465,320 2580,435 2580,735 P1.3
VBAT: P5.5 S1.3 | length 5326.2
  Top Layer w20: P5.5 205,-485 550,-485 620,-555 750,-555 810,-615 810,-775 870,-835 2640,-835 2670,-805 2670,1245 2530,1385 2530,1535 S1.3
VCC: C2.1 S1.2 U1.1 | length 4634.1
  Top Layer w20: v1(660,-655) v1(710,-655) 740,-655 760,-675 760,-785 836,-861 2663.8,-861 2696,-828.8 2696,1257.75 2560,1393.75 2560,1465 S1.2
VSTVC: C14.2 P3.39 P3.40 R10.1 | length 534.7
  Top Layer w8: v1(700,1675) 730,1705 v1(730,1755)
  Bottom Layer w8: P3.39 531.06,1568.86 593.86,1568.86 600,1575 600,1588.86 ; P3.40 600,1588.86 ; v1(730,1755) R10.1 ; C14.2 v1(700,1675) 700,1660.58 629.42,1590 619.64,1590 618.5,1588.86 600,1588.86
pads on no net: D6.4 P2.M1 P2.M2 P2.M3 P2.M4 P3.10 P3.11 P5.M1

## Polygon pours and split planes (outlines as drawn)
GND on Bottom Layer "Bottom-GND" (solid, remove dead copper, pour order 29): -430,3085 4340,3085 4340,-1115 cw(c4240,-1115) 4240,-1215 240,-1570 cw(c-30,-1110) -490,-1380
GND on Bottom Layer "Bottom Layer-No Net" (solid, pour order 21): 734,-705 482,-705 421,-644 421,-512 404,-495 370,-495 217,-648 217,-758 246,-787 246,-877 363,-994 415,-994 415,-864 485,-794 699,-794 734,-759
VCC on Bottom Layer "Bottom Layer-No Net" (solid, pour order 25): 464,-506 470,-500 700,-500 734,-534 734,-697 489,-697 464,-672
3.3V on Bottom Layer "Bottom Layer-No Net" (solid, pour order 22): 494,-817 584,-817 584,-941 531,-994 462,-994 462,-849
GND on Top Layer "Top-GND" (solid, remove dead copper, pour order 27): -430,3085 4325,3085 4325,-1115.08 cw(c4225,-1115.08) 4225,-1215.08 135,-1475.08 cw(c-92.5,-1077.58) -490,-1305.08

## Keep-outs
Keep-Out Layer:
  the board outline again, w8

## Other copper
Top Layer:
  text ".Layer_Name" at 3127.25,1428.43 h60
Bottom Layer:
  pour cut-out: 377.2,785.71 471.69,785.71 471.69,722.72 440.2,722.72 440.2,691.22 377.2,691.22
  pour cut-out: 377.2,792.2 479,792.2 479,716.22 446.69,716.22 446.69,691.22 440.2,684.73 377.2,684.73 370.71,691.22 370.71,785.71
  pour cut-out: 377.2,1725.27 440.2,1725.27 446.69,1718.78 446.69,1693.78 471.69,1693.78 478.19,1687.28 478.19,1618.19 477.8,1617.8 377.2,1617.8 370.71,1624.29 370.71,1718.78
  pour cut-out: 519,1437 533,1437 541.16,1445.16 564.57,1445.16 564.57,1382.35 564.21,1382 522,1382
  pour cut-out: 553,867 561.21,867 564.21,870 563.26,870.95 563.26,909.37 562.63,910 514,910 514,866 517,863
  text ".Layer_Name" at 3127.25,1318.43 h60

## Silkscreen, mask and mechanical layers (free items; w line width, h text height)
Top Overlay:
  lines w7.99: 2670,1375 2734.8,1375 ; 2670,1675 2734.8,1675
  lines w8: 2734.8,1375 2734.8,1675
  text ".Layer_Name" at 3127.25,1648.43 h60
  text "BAT" at 2725,1610 h20 r90
  text "5V/OFF" at 2725,1385 h20 r90
  text "I am nobody.." at 640,1120 h100
  text "5V" at 2725,950 h25 r90
  text "GND" at 2730,845 h25 r90
  text "TXD" at 2730,735 h25 r90
  text "RXD" at 2730,630 h25 r90
  text "2024" at 1640,-285 h100
  text "Offensive Summit" at 1400,-445 h60
Bottom Overlay:
  drawing of 133 lines, arcs and shapes, not listed
  text ".Layer_Name" at 3127.25,1108.43 h60
  text "4" at 990,-175 h75 r270
  text "2" at 990,-275 h75 r270
  text "0" at 990,-375 h75 r270
  text "2" at 990,-475 h75 r270
  text "Offensive Summit" at 1170,-855 h75 r270
Top Paste:
  text ".Layer_Name" at 3126.77,1767.72 h60
Bottom Paste:
  text ".Layer_Name" at 3138.58,988.19 h60
Top Solder:
  text ".Layer_Name" at 3127.25,1538.43 h60
Bottom Solder:
  text ".Layer_Name" at 3127.25,1208.43 h60
Dimension:
  text ".Layer_Name" at 3127.25,478.43 h60
Stackup:
  lines w15: -59.71,2423.1 350.21,2423.1 1279.95,2423.1 2139.72,2423.1 2789.55,2423.1 ; -59.71,2543.1 350.21,2543.1 1279.95,2543.1 2139.72,2543.1 2789.55,2543.1 ; -59.71,2903.1 350.21,2903.1 1279.95,2903.1 2139.72,2903.1 2789.55,2903.1 ; -59.71,3023.1 350.21,3023.1 1279.95,3023.1 2139.72,3023.1 2789.55,3023.1 ; -59.71,3143.1 2789.1,3143.1 ; 350.21,3263.1 350.21,2303.1 ; 1279.95,3263.1 1279.95,2303.1 ; 2139.72,3263.1 2139.72,2303.1 ; 2789.1,3263.1 -59.71,3263.1 -59.71,2303.1 350.21,2303.1 ; 2789.55,3263.1 2789.55,2303.1 2139.72,2303.1 ; 350.21,2303.1 1279.95,2303.1 ; 350.21,2663.1 1279.95,2663.1 ; 350.21,2663.1 -59.71,2663.1 350.21,2663.1 ; 350.21,2663.1 1279.95,2663.1 ; 350.21,2783.1 -59.71,2783.1 350.21,2783.1 ; 350.21,2783.1 1279.95,2783.1 ; 350.21,2783.1 1279.95,2783.1 ; 1279.95,2303.1 2139.72,2303.1 ; 1279.95,2663.1 2139.72,2663.1 ; 1279.95,2663.1 2139.72,2663.1 ; 1279.95,2783.1 2139.72,2783.1 ; 1279.95,2783.1 2139.72,2783.1 ; 2139.72,2663.1 2789.55,2663.1 2139.72,2663.1 ; 2139.72,2783.1 2789.55,2783.1 2139.72,2783.1
  text "OS-2024-Badge-REV0" at -60.9,3333.1 h60
  text "Layer" at 0.29,3173.1 h60
  text "Name" at 410.21,3173.1 h60
  text "Material" at 1339.95,3173.1 h60
  text "Thickness" at 2199.72,3173.1 h60
  text "1" at 0.29,3053.1 h60
  text "Top Overlay" at 410.21,3053.1 h60
  text "2" at 0.29,2933.1 h60
  text "Top Solder" at 410.21,2933.1 h60
  text "Solder Resist" at 1339.95,2933.1 h60
  text "0.40mil" at 2199.72,2933.1 h60
  text "3" at 0.29,2813.1 h60
  text "TOP" at 410.21,2813.1 h60
  text "Copper" at 1339.95,2813.1 h60
  text "1.35mil" at 2199.72,2813.1 h60
  text "4" at 0.29,2693.1 h60
  text "Core" at 410.21,2693.1 h60
  text "FR-4" at 1339.95,2693.1 h60
  text "59.5mil" at 2199.72,2693.1 h60
  text "5" at 0.29,2573.1 h60
  text "BOTTOM" at 410.21,2573.1 h60
  text "Copper" at 1339.95,2573.1 h60
  text "1.35mil" at 2199.72,2573.1 h60
  text "6" at 0.29,2453.1 h60
  text "Bottom Solder" at 410.21,2453.1 h60
  text "Solder Resist" at 1339.95,2453.1 h60
  text "0.40mil" at 2199.72,2453.1 h60
  text "7" at 0.29,2333.1 h60
  text "Bottom Overlay" at 410.21,2333.1 h60
  text ".Layer_Name" at 3127.25,598.43 h60
Board Outline:
  the board outline again, w8
Comments:
  lines w8: 4376.46,3084.21 4348.9,3084.21 ; 4348.9,3084.21 4348.9,3084.21
Drill Drawing:
  circle w10: c83.4,-1999.67 r33.33
  circle w10: c83.4,-2749.67 r20
  circle w10: c83.4,-2749.67 r33.33
  lines w10: 50.07,-3233 83.4,-3216.33 116.74,-3233 100.07,-3199.67 116.74,-3166.33 83.4,-3183 50.07,-3166.33 66.74,-3199.67 50.07,-3233 ; 50.07,-3083 116.74,-3083 116.74,-3016.33 50.07,-3016.33 50.07,-3083 ; 50.07,-2933 50.07,-2916.33 66.74,-2899.67 50.07,-2883 50.07,-2866.33 66.74,-2866.33 83.4,-2883 100.07,-2866.33 116.74,-2866.33 116.74,-2883 100.07,-2899.67 116.74,-2916.33 116.74,-2933 100.07,-2933 83.4,-2916.33 66.74,-2933 50.07,-2933 ; 50.07,-2566.33 116.74,-2566.33 83.4,-2633 50.07,-2566.33 ; 50.07,-2449.67 83.4,-2483 116.74,-2449.67 83.4,-2416.33 50.07,-2449.67 ; 50.07,-2316.33 66.74,-2316.33 66.74,-2333 100.07,-2333 100.07,-2316.33 116.74,-2316.33 116.74,-2283 100.07,-2283 100.07,-2266.33 66.74,-2266.33 66.74,-2283 50.07,-2283 50.07,-2316.33 ; 50.07,-2166.33 66.74,-2166.33 83.4,-2183 100.07,-2166.33 116.74,-2166.33 100.07,-2149.67 116.74,-2133 100.07,-2133 83.4,-2116.33 66.74,-2133 50.07,-2133 66.74,-2149.67 50.07,-2166.33
  lines w15: -9.72,-3278 2841.54,-3278 ; -9.72,-1928 2841.54,-1928 ; 541.16,-3428 541.16,-1778 ; 1131,-3428 1131,-1778 ; 2290.66,-3428 2290.66,-1778 ; -9.72,-3428 2841.54,-3428 2841.54,-1778 -9.72,-1778 -9.72,-3428
  text ".Legend" at -2676,4933 h60
  text ".Layer_Name" at 3127.25,374.92 h60
  text "Symbol" at 80.28,-1883 h72
  text "Count" at 586.16,-1883 h72
  text "Hole Size" at 1176,-1883 h72
  text "Plated" at 2335.66,-1883 h72
  text "1" at 586.16,-2033 h60
  text "6.700mm (263.78mil)" at 1176,-2033 h60
  text "PTH" at 2335.66,-2033 h60
  text "2" at 586.16,-2183 h60
  text "1.800mm (70.87mil)" at 1176,-2183 h60
  text "PTH" at 2335.66,-2183 h60
  text "4" at 586.16,-2333 h60
  text "3.658mm (144.00mil)" at 1176,-2333 h60
  text "PTH" at 2335.66,-2333 h60
  text "8" at 586.16,-2483 h60
  text "2.000mm (78.74mil)" at 1176,-2483 h60
  text "PTH" at 2335.66,-2483 h60
  text "11" at 586.16,-2633 h60
  text "1.610mm (63.39mil)" at 1176,-2633 h60
  text "PTH" at 2335.66,-2633 h60
  text "12" at 586.16,-2783 h60
  text "1.200mm (47.24mil)" at 1176,-2783 h60
  text "PTH" at 2335.66,-2783 h60
  text "16" at 586.16,-2933 h60
  text "0.508mm (20.00mil)" at 1176,-2933 h60
  text "PTH" at 2335.66,-2933 h60
  text "44" at 586.16,-3083 h60
  text "0.900mm (35.43mil)" at 1176,-3083 h60
  text "PTH" at 2335.66,-3083 h60
  text "77" at 586.16,-3233 h60
  text "0.381mm (15.00mil)" at 1176,-3233 h60
  text "PTH" at 2335.66,-3233 h60
  text "175 Total" at 586.16,-3383 h60

## Dimensions
0,-1135 to 2745,-1135 on Dimension
100,2195 to 100,-1235 on Dimension

## Text inside footprints (layer, text, board x,y; h text height)
P5: Top Overlay "BATT" at 520,-370 h60 r180; Top Overlay "USB" at 345,-1145 h60